# EAGLE board Power supply (EAGLE 8.3.0)
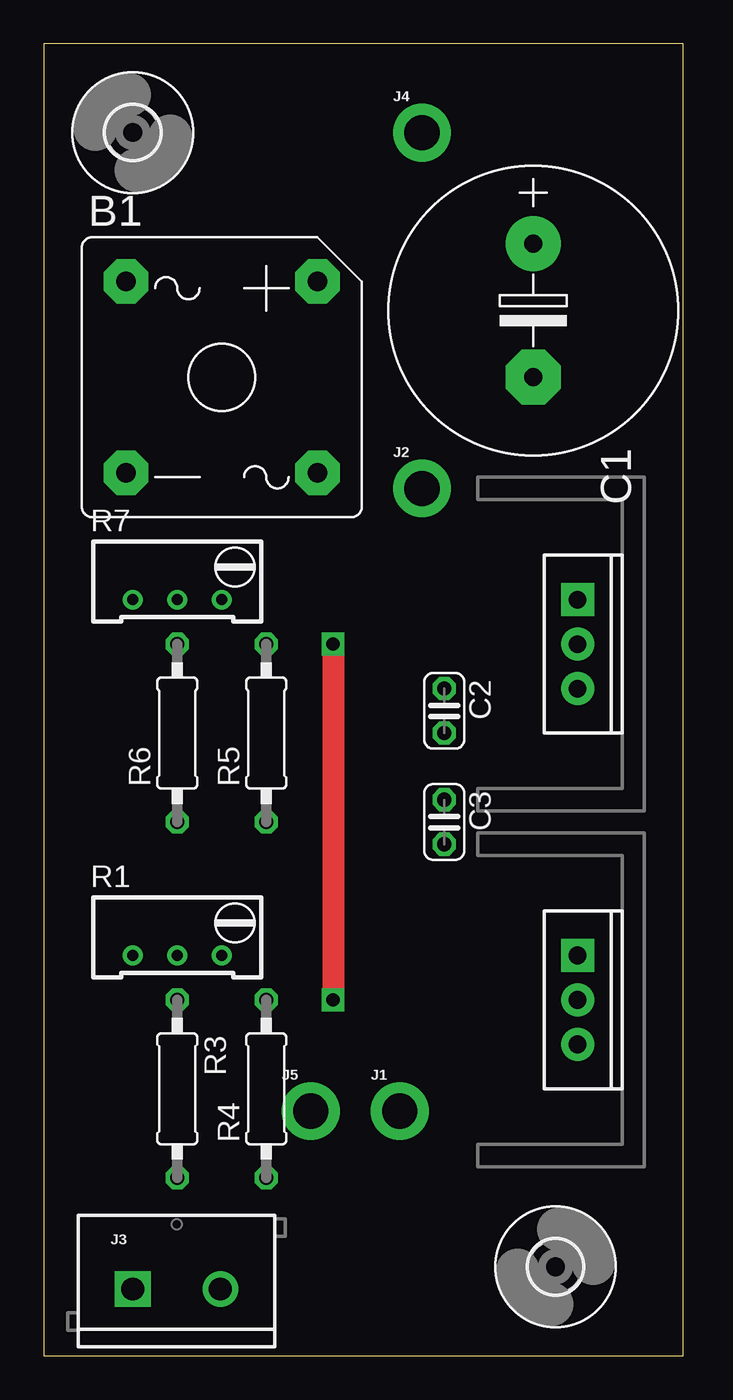
[diagram p0: board, top side]
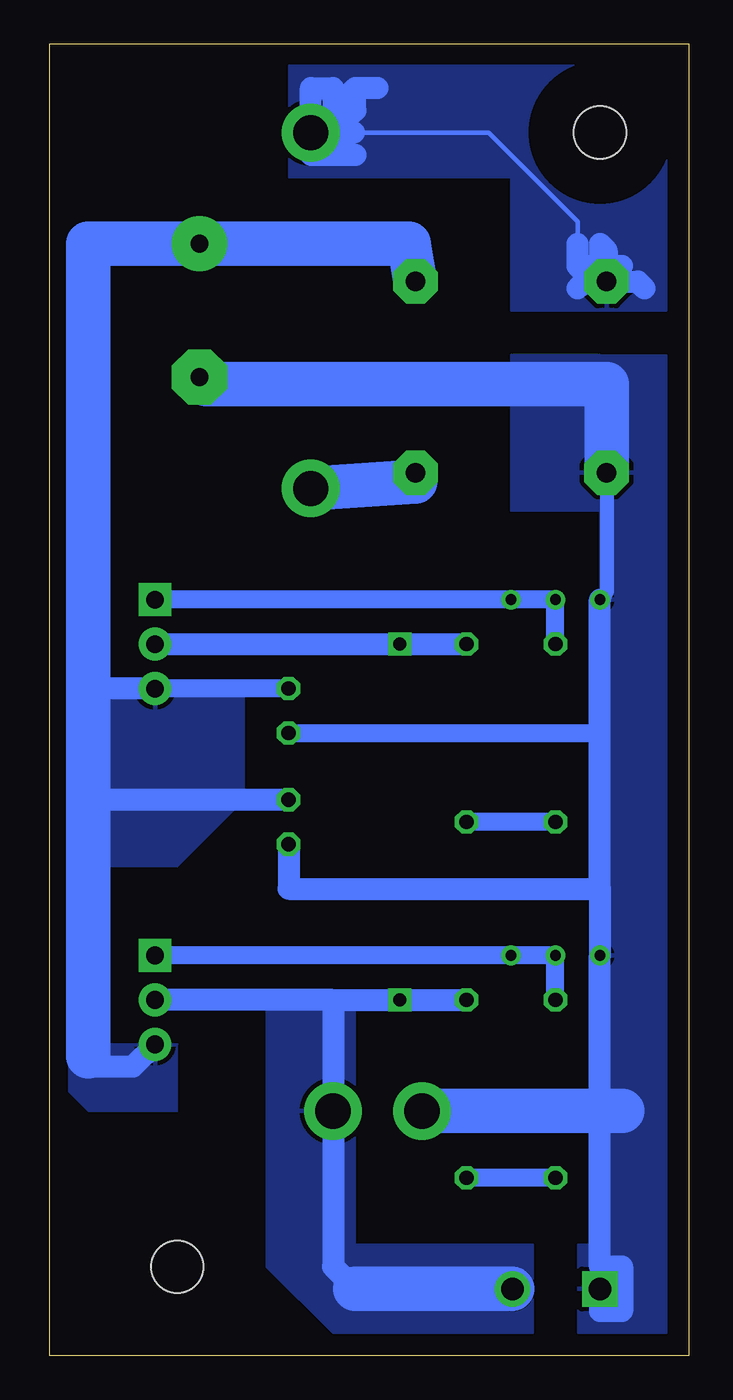
[diagram p1: board, bottom side, seen from below]

Size 36.5 x 74.92 mm. Coordinates in mm from the lower left corner, seen from the top.
Outline: 0,0 36.5,0 36.5,74.92 0,74.92 0,0
Copper layers (1*16): Top 0.035mm / dielectric 1.5mm / Bottom 0.035mm
Design rules "default": minimum track width 6mil, minimum drill 0.35mm, track to track 6mil, track to pad 6mil, pad to pad 6mil, via to via 6mil, smd to smd 6mil, copper to edge 40mil, drill to drill 6mil, minimum pad ring 10mil, minimum via ring 8mil, stop-mask expansion 4mil, vias tented up to drill 0mil, thermal gap 10mil

## Footprints (pad centres in the part's own frame; a part is rotated, then mirrored left to right if it is on the bottom)
GBPC1 = drill 1.118 pad 2.54 octagon: + 5.461,5.461; - -5.461,-5.461; AC1 -5.461,5.461; AC2 5.461,-5.461
E7,5-16 = drill 1.016 pad 3.15: + -3.81,0 | drill 1.016 pad 3.15 octagon: - 3.81,0
C025-024X044 = drill 0.813 octagon: 1 -1.27,0; 2 1.27,0
3,0 = hole 3: 0,0
1X01_2MM = drill 2 pad 3.302: 1 0,0
SCREWTERMINAL-5MM-2 = drill 1.3 pad 2.032 square: 1 0,0 | drill 1.3 pad 2.032: 2 5,0
RTRIM64W = drill 0.61: 1 1.27,-2.54; 2 1.27,0; 3 1.27,2.54
0207/10 = drill 0.813 octagon: 1 -5.08,0; 2 5.08,0
TO220-ADJ = drill 1 pad 1.88 square: ADJ -2.54,0 | drill 1 pad 1.88: IN 2.54,0; OUT 0,0

## Placement (x,y rotation side)
B1  [GBPC1]  10.16,55.88 0 top
C1  2200uF  [E7,5-16]  27.94,59.69 270 top
C2  0.1uF  [C025-024X044]  22.86,36.83 270 top
C3  0.1uF  [C025-024X044]  22.86,30.48 270 top
H1  MOUNT-HOLE3.0  [3,0]  29.21,5.08 0 top
H2  MOUNT-HOLE3.0  [3,0]  5.08,69.85 270 top
J1  [1X01_2MM]  20.32,13.97 0 top
J2  [1X01_2MM]  21.59,49.53 0 top
J3  24v  [SCREWTERMINAL-5MM-2]  5.08,3.81 0 top
J4  [1X01_2MM]  21.59,69.85 0 top
J5  [1X01_2MM]  15.24,13.97 0 top
R1  5K  [RTRIM64W]  7.62,24.13 270 top
R3  22  [0207/10]  7.62,15.24 270 top
R4  220  [0207/10]  12.7,15.24 90 top
R5  220  [0207/10]  12.7,35.56 90 top
R6  22  [0207/10]  7.62,35.56 90 top
R7  5k  [RTRIM64W]  7.62,44.45 270 top
U1  V_REG_317SINK  [TO220-ADJ]  30.48,40.64 270 top
U2  V_REG_317SINK  [TO220-ADJ]  30.48,20.32 270 top

## Library data of the parts
B1 = rectifier
C1-C3 R1 R3-R7 = resistor
H1 H2 = holes
J1 J2 J4 J5 = SparkFun-Connectors
J3 = SparkFun-Connectors; SF_SKU: PRT-08432
U1 U2 = SparkFun-IC-Power

## Nets
GND: B1.- C1.- C2.2 C3.2 J3.1 J5.1 R1.1 R7.1
N$1: R1.2 R1.3 R3.1 U2.ADJ
N$2: B1.AC1 J4.1
N$3: B1.AC2 J2.1
N$5: R3.2 R4.1
N$6: J1.1 J3.2 R4.2 R5.2 U1.OUT U2.OUT
N$8: B1.+ C1.+ C2.1 C3.1 U1.IN U2.IN
N$9: R6.2 R7.2 R7.3 U1.ADJ
N$10: R5.1 R6.1

## Tracks (layer width: path | path; a pad name or v marks a point on that pad's centre or on a via)
GND
  Bottom 0.813: B1.- 4.7,43.56 R7.1
  Bottom 1.016: R1.1 5.08,15.24 | C2.2 5.08,35.56 R7.1
  Bottom 1.27: 5.08,26.67 R7.1 | 5.08,26.67 R1.1 5.08,13.97 5.08,5.08 3.81,5.08 3.81,2.54 5.08,2.54 J3.1 | C3.2 22.86,26.67 5.08,26.67
  Bottom 2.54: B1.- 4.7,55.5 27.56,55.5 C1.- | J5.1 5.08,13.97 3.81,13.97
  pour Bottom: 5.08,1.27 5.08,57.15 1.27,57.15 1.27,1.27
  pour Bottom: 5.08,57.15 10.16,57.15 10.16,48.26 5.08,48.26
  pour Bottom: 5.08,1.27 6.35,1.27 6.35,6.35 5.08,6.35
N$1
  Bottom 1.016: R3.1 R1.2 R1.3 U2.ADJ
N$2
  Bottom 0.254: 6.35,63.5 6.35,64.77 11.43,69.85 19.11,69.85
  Bottom 1.27: B1.AC1 4.7,63.12 5.08,63.5 5.08,61.72 B1.AC1 | B1.AC1 5.97,61.34 6.35,60.96 | B1.AC1 2.92,61.34 2.54,60.96 | B1.AC1 5.46,61.34 6.35,62.23 | 6.35,62.23 3.81,62.23 6.35,62.23 | 6.35,62.23 6.35,63.5 | J4.1 19.11,69.85 | 19.05,72.39 17.78,72.39 19.05,72.39 | J4.1 21.59,68.58 19.05,68.58 20.32,68.58 J4.1 | J4.1 20.32,69.85 19.05,71.12 19.05,72.39 | 19.05,72.39 J4.1 | J4.1 21.59,72.39 20.32,72.39 20.32,71.12 J4.1
  pour Bottom: 1.27,59.69 1.27,73.66 22.86,73.66 22.86,67.31 10.16,67.31 10.16,59.69
N$3
  Bottom 2.54: B1.AC2 15.62,49.91 J2.1
N$5
  Bottom 1.016: R3.2 R4.1
N$6  (via drill 0.75 pad 1.3)
  Top 1.27: v16.51,40.64 v16.51,20.32
  Bottom 1.27: 19.68,4.45 19.05,3.81 20.32,5.08 J1.1 20.32,20.3 20.34,20.32 | 20.34,20.32 v16.51,20.32 R4.2 | 20.34,20.32 U2.OUT | U1.OUT v16.51,40.64 R5.2
  Bottom 2.54: J3.2 19.05,3.81
  pour Bottom: 8.89,1.27 8.89,6.35 19.05,6.35 19.05,20.32 24.13,20.32 24.13,5.08 20.32,1.27
N$8
  Bottom 1.016: C2.1 U1.IN
  Bottom 1.27: 34.29,38.1 34.29,46.99 | 34.29,31.75 34.29,38.1 | 34.29,31.75 34.29,17.08 34.29,16.51 31.75,16.51 U2.IN | U1.IN 34.29,38.1 | C3.1 34.29,31.75
  Bottom 2.54: B1.+ 16,63.5 C1.+ 34.29,63.5 34.29,17.08
  pour Bottom: 29.21,17.78 35.56,17.78 35.56,15.24 34.29,13.97 29.21,13.97
  pour Bottom: 30.48,38.1 25.4,38.1 25.4,31.75 26.67,30.48 29.21,27.94 34.29,27.94 34.29,38.1
N$9
  Bottom 1.016: U1.ADJ R7.3 R7.2 R6.2
N$10
  Bottom 1.016: R6.1 R5.1